# EAGLE board CT_schematic (EAGLE 7.6.0)

Size 100 x 80 mm. Coordinates in mm from the lower left corner, seen from the top.
Outline: 0,0 100,0 100,80 0,80 0,0
Copper layers (1*16): Top 0.035mm / dielectric 1.5mm / Bottom 0.035mm
Design rules "default": minimum track width 10mil, minimum drill 24mil, track to track 8mil, track to pad 8mil, pad to pad 8mil, via to via 8mil, smd to smd 8mil, copper to edge 40mil, drill to drill 8mil, minimum pad ring 10mil, minimum via ring 8mil, stop-mask expansion 4mil, vias tented up to drill 0mil, thermal gap 10mil

## Footprints (pad centres in the part's own frame; a part is rotated, then mirrored left to right if it is on the bottom)
C0603 = smd 0.8 x 0.8: 1 -0.762,0; 2 0.762,0
C0402 = smd 0.5 x 0.5: 1 -0.508,0; 2 0.508,0
C0805 = smd 1.2 x 1.3: 1 -1.016,0; 2 1.016,0
C1206 = smd 1.3 x 1.6: 1 -1.524,0; 2 1.524,0
L0603 = smd 0.8 x 0.8: 1 -0.762,0; 2 0.762,0
L1210 = smd 1.2 x 2.5: 1 -1.524,0; 2 1.524,0
DR1040 = smd 1.6 x 3.2: 1 -4.458,0; 2 4.458,0
R0603 = smd 0.8 x 0.8: 1 -0.762,0; 2 0.762,0
UFQFPN28 = smd 0.559 x 0.305: 1 -2.07,1.5; 7 -2.07,-1.5; 15 2.07,-1.5; 21 2.07,1.5 | smd 0.813 x 0.305: 2 -1.943,1; 3 -1.943,0.5; 4 -1.943,0; 5 -1.943,-0.5; 6 -1.943,-1; 16 1.943,-1; 17 1.943,-0.5; 18 1.943,0; 19 1.943,0.5; 20 1.943,1 | smd 0.305 x 0.559: 8 -1.5,-2.07; 14 1.5,-2.07; 22 1.5,2.07; 28 -1.5,2.07 | smd 0.305 x 0.813: 9 -1,-1.943; 10 -0.5,-1.943; 11 0,-1.943; 12 0.5,-1.943; 13 1,-1.943; 23 1,1.943; 24 0.5,1.943; 25 0,1.943; 26 -0.5,1.943; 27 -1,1.943
SAMTEC_FTSH-105-01-L-DV-K = smd 0.762 x 2.794: 1 -2.54,-2.032; 2 -2.54,2.032; 3 -1.27,-2.032; 4 -1.27,2.032; 5 0,-2.032; 6 0,2.032; 7 1.27,-2.032; 8 1.27,2.032; 9 2.54,-2.032; 10 2.54,2.032
SSOP-16 = smd 1.981 x 0.356: 1 -2.464,2.223; 2 -2.464,1.587; 3 -2.464,0.953; 4 -2.464,0.318; 5 -2.464,-0.318; 6 -2.464,-0.953; 7 -2.464,-1.587; 8 -2.464,-2.223; 9 2.464,-2.223; 10 2.464,-1.587; 11 2.464,-0.953; 12 2.464,-0.318; 13 2.464,0.318; 14 2.464,0.953; 15 2.464,1.587; 16 2.464,2.223
HTSS-105-01-G-D = drill 1 pad 1.8 square: 1 0,0 | drill 1 pad 1.8: 2 0,2.54; 3 2.54,0; 4 2.54,2.54; 5 5.08,0; 6 5.08,2.54; 7 7.62,0; 8 7.62,2.54; 9 10.16,0; 10 10.16,2.54
ABLS-25.000MHZ-B2F-T = smd 5.6 x 2.8: 1 -3.81,0; 2 5.69,0
TSOT-23-5 = smd 1.3 x 0.62: 1 -1.31,0.95; 2 -1.31,0; 3 -1.31,-0.95; 4 1.31,-0.95; 5 1.31,0.95
DFN8_2X3MC = smd 0.813 x 0.305: 1 -1.398,0.75; 2 -1.398,0.25; 3 -1.398,-0.25; 4 -1.398,-0.75; 5 1.398,-0.75; 6 1.398,-0.25; 7 1.398,0.25; 8 1.398,0.75 | smd 1.753 x 1.549: 9 0,0
JST-2-SMD = smd 1 x 4.6: 1 -1,-3.7; 2 1,-3.7 | smd 1.6 x 3.4: NC1 -3.4,1.5; NC2 3.4,1.5
FCI_10118193-0001LF = smd 0.4 x 1.35: 1 -1.3,2.675; 2 -0.65,2.675; 3 0,2.675; 4 0.65,2.675; 5 1.3,2.675 | smd 1.6 x 1.4: 6 -3.2,2.45; 7 3.2,2.45 | smd 1.9 x 1.9: 8 -1.2,0; 9 1.2,0 | hole 0.5: -3.3,0; 3.3,0
SON-6 = smd 0.55 x 0.3: 1 -0.355,0.5 | smd 0.52 x 0.3: 2 -0.37,0; 3 -0.37,-0.5; 4 0.37,-0.5; 5 0.37,0; 6 0.37,0.5
SW_4-1437565-2 = smd 1.4 x 2.1: 1 -2.23,4.55; 2 -2.23,-4.55; 3 2.23,4.55; 4 2.23,-4.55
LGM67K-G1J2-24-Z = smd 0.8 x 1.4: A -2,0; C 0,0
NC7SZ125M5X = smd 1.3 x 0.7: 1 -1.3,0.95; 2 -1.3,0; 3 -1.3,-0.95; 4 1.3,-0.95; 5 1.3,0.95

## Placement (x,y rotation side)
C1  1e-07  [C0603]  -15.24,55.88 0 top  (outside the outline)
C2  4.7e-06  [C0603]  -59.69,50.8 0 top  (outside the outline)
C3  1e-08  [C0603]  -19.05,55.88 0 top  (outside the outline)
C4  1e-06  [C0603]  -22.86,55.88 0 top  (outside the outline)
C5  1e-11  [C0402]  -64.77,55.88 0 top  (outside the outline)
C6  1e-11  [C0402]  -15.24,60.96 0 top  (outside the outline)
C7  1e-07  [C0402]  -19.05,60.96 0 top  (outside the outline)
C8  1e-06  [C0603]  -26.67,55.88 0 top  (outside the outline)
C9  1e-06  [C0603]  -30.48,55.88 0 top  (outside the outline)
C10  2.2e-07  [C0603]  -63.5,50.8 0 top  (outside the outline)
C11  1e-06  [C0603]  -34.29,55.88 0 top  (outside the outline)
C12  1e-06  [C0603]  -38.1,55.88 0 top  (outside the outline)
C13  1e-05  [C0805]  -21.59,45.72 0 top  (outside the outline)
C14  1e-05  [C0805]  -26.67,45.72 0 top  (outside the outline)
C15  1e-07  [C0402]  -22.86,60.96 0 top  (outside the outline)
C16  1e-05  [C1206]  -50.8,38.1 0 top  (outside the outline)
C17  1e-05  [C1206]  -57.15,38.1 0 top  (outside the outline)
C18  1e-08  [C0402]  -26.67,60.96 0 top  (outside the outline)
C19  1e-08  [C0402]  -30.48,60.96 0 top  (outside the outline)
F1  240.0  [L0603]  -41.91,55.88 0 top  (outside the outline)
I1  1e-05  [L1210]  -29.21,38.1 0 top  (outside the outline)
I2  7e-06  [DR1040]  -19.05,20.32 0 top  (outside the outline)
R1  10000.0  [R0603]  -15.24,50.8 0 top  (outside the outline)
R2  1000.0  [R0603]  -45.72,55.88 0 top  (outside the outline)
R3  1270.0  [R0603]  -49.53,55.88 0 top  (outside the outline)
R4  4700.0  [R0603]  -53.34,55.88 0 top  (outside the outline)
R5  10000.0  [R0603]  -20.32,50.8 0 top  (outside the outline)
R6  10000.0  [R0603]  -25.4,50.8 0 top  (outside the outline)
R7  10000.0  [R0603]  -30.48,50.8 0 top  (outside the outline)
R8  10000.0  [R0603]  -35.56,50.8 0 top  (outside the outline)
R9  5.0  [R0603]  -57.15,55.88 0 top  (outside the outline)
R10  100000.0  [R0603]  -52.07,45.72 0 top  (outside the outline)
R11  309473.68421053  [R0603]  -41.91,45.72 0 top  (outside the outline)
R12  1000000.0  [R0603]  -46.99,45.72 0 top  (outside the outline)
R13  10000.0  [R0603]  -40.64,50.8 0 top  (outside the outline)
R14  10000.0  [R0603]  -45.72,50.8 0 top  (outside the outline)
R15  18000.0  [R0603]  -50.8,50.8 0 top  (outside the outline)
R16  470000.0  [R0603]  -57.15,45.72 0 top  (outside the outline)
R17  120000.0  [R0603]  -62.23,45.72 0 top  (outside the outline)
R18  2000.0  [R0603]  -60.96,55.88 0 top  (outside the outline)
R19  10000.0  [R0603]  -55.88,50.8 0 top  (outside the outline)
U1  stm32f031g6u7  [UFQFPN28]  -43.18,38.1 0 top  (outside the outline)
U2  FTSH-105-01-L-DV-K  [SAMTEC_FTSH-105-01-L-DV-K]  -35.56,7.62 0 top  (outside the outline)
U3  LTC2804CGN-1#PBF  [SSOP-16]  -55.88,20.32 0 top  (outside the outline)
U4  HTSS-105-01-G-D  [HTSS-105-01-G-D]  -27.94,29.21 0 top  (outside the outline)
U5  ABLS-25.000MHZ-B2F-T  [ABLS-25.000MHZ-B2F-T]  -55.88,30.48 0 top  (outside the outline)
U6  ltc3406es5  [TSOT-23-5]  -31.75,44.45 0 top  (outside the outline)
U7  MCP73831T-2ACI/MC  [DFN8_2X3MC]  -39.37,59.69 0 top  (outside the outline)
U8  S2B-PH-SM4-TB(LF)(SN)  [JST-2-SMD]  -34.29,21.59 0 top  (outside the outline)
U9  10118193-0001LF  [FCI_10118193-0001LF]  -36.83,29.21 0 top  (outside the outline)
U10  TPS3895ADRYR  [SON-6]  -33.02,59.69 0 top  (outside the outline)
U11  4-1437565-2  [SW_4-1437565-2]  -57.15,6.35 0 top  (outside the outline)
U12  Q65110A2395  [LGM67K-G1J2-24-Z]  -17.78,39.37 0 top  (outside the outline)
U13  nc7sz125m5x  [NC7SZ125M5X]  -62.23,36.83 0 top  (outside the outline)
U14  nc7sz125m5x  [NC7SZ125M5X]  -15.24,44.45 0 top  (outside the outline)

## Library data of the parts
C1-C19 F1 I1 I2 R1-R19 U1-U14 = circuit_tree

## Nets
CLK_CRYSTAL_U1_2: C5.1 U1.2 U5.1
CLK_CRYSTAL_U1_3: C6.1 U1.3 U5.2
GND: C1.2 C2.2 C3.2 C4.2 C5.2 C6.2 C7.2 C8.2 C9.2 C11.2 C12.2 C13.2 C14.1 C14.2 C15.2 C16.2 C17.2 C18.2 C19.2 R2.2 R5.2 R9.2 R11.2 R15.2 R17.2 R18.2 U1.16 U2.3 U2.5 U3.8 U4.9 U6.2 U7.6 U7.9 U8.2 U9.5 U9.6 U9.7 U9.8 U9.9 U10.2 U12.C U13.2 U13.3 U14.1 U14.3
INPUT_USBPOWER_5V: C16.1 R19.2 U7.1 U7.2 U9.1
NET_U1_1: R5.1 U1.1
NET_U1_4: R4.1 U1.4 U14.4
NET_U1_5: C3.1 C4.1 F1.1 U1.5
NET_U1_27: R3.1 U1.27 U12.A
NET_U1_28: R1.1 U1.28 U11.3 U11.4
NET_U2_9: R9.1 U2.9
NET_U3_6: C8.1 U3.6
NET_U3_7: C10.1 I1.2 U3.7
NET_U3_9: C9.1 U3.9
NET_U3_10: C10.2 U3.10
NET_U3_11: R10.1 U3.11
NET_U4_3: U3.1 U4.3
NET_U4_4: U3.2 U4.4
NET_U4_5: U3.3 U4.5
NET_U4_6: U3.4 U4.6
NET_U6_1: U6.1
NET_U6_3: I2.1 U6.3
NET_U6_5: R11.1 R12.1 U6.5
NET_U6_ATNET_3: I2.2 R12.2
NET_U7_5: R19.1 U7.5
NET_U7_8: R18.1 U7.8
NET_U10_1: R14.1 R15.1 U10.1
NET_U10_3: R16.2 R17.1 U10.3
NET_U10_4: R13.1 U10.4 U13.4 U14.2
NET_U11_1: R2.1 U11.1 U11.2
PROC_SYS_SWCLK: R7.1 U1.22 U2.4
PROC_SYS_SWDIO: R8.1 U1.21 U2.2
PROC_USART1_CTS: U1.6 U3.13
PROC_USART1_RTS: U1.7 U3.15
PROC_USART1_RX: U1.9 U3.16
PROC_USART1_TX: U1.8 U3.14
RST_OUT_U2_JTAG_RST_B: R6.1 U2.10 U13.1
VCC_S1_3V7: C13.1 C17.1 U6.4 U7.3 U7.4 U8.1
VCC_TIER1_2V5: C1.1 C2.1 C7.1 C11.1 C12.1 C14.2 C15.1 C18.1 C19.1 F1.2 I1.1 I2.2 R1.2 R3.2 R4.2 R6.2 R7.2 R8.2 R10.2 R12.2 R13.2 R14.2 R16.1 U1.17 U2.1 U3.5 U3.12 U10.6 U13.5 U14.5

## Tracks (layer width: path | path; a pad name or v marks a point on that pad's centre or on a via)
CLK_CRYSTAL_U1_2  (2 unrouted)
CLK_CRYSTAL_U1_3  (2 unrouted)
GND  (45 unrouted)
INPUT_USBPOWER_5V  (4 unrouted)
NET_U1_1  (1 unrouted)
NET_U1_4  (2 unrouted)
NET_U1_5  (3 unrouted)
NET_U1_27  (2 unrouted)
NET_U1_28  (3 unrouted)
NET_U2_9  (1 unrouted)
NET_U3_6  (1 unrouted)
NET_U3_7  (2 unrouted)
NET_U3_9  (1 unrouted)
NET_U3_10  (1 unrouted)
NET_U3_11  (1 unrouted)
NET_U4_3  (1 unrouted)
NET_U4_4  (1 unrouted)
NET_U4_5  (1 unrouted)
NET_U4_6  (1 unrouted)
NET_U6_3  (1 unrouted)
NET_U6_5  (2 unrouted)
NET_U6_ATNET_3  (1 unrouted)
NET_U7_5  (1 unrouted)
NET_U7_8  (1 unrouted)
NET_U10_1  (2 unrouted)
NET_U10_3  (2 unrouted)
NET_U10_4  (3 unrouted)
NET_U11_1  (2 unrouted)
PROC_SYS_SWCLK  (2 unrouted)
PROC_SYS_SWDIO  (2 unrouted)
PROC_USART1_CTS  (1 unrouted)
PROC_USART1_RTS  (1 unrouted)
PROC_USART1_RX  (1 unrouted)
PROC_USART1_TX  (1 unrouted)
RST_OUT_U2_JTAG_RST_B  (2 unrouted)
VCC_S1_3V7  (5 unrouted)
VCC_TIER1_2V5  (29 unrouted)